# Altium PCB SteeringWheelInterfaceBoard.PcbDoc
Units mm, origin at the board's own origin, x right, y up, seen from the top; angles counter-clockwise.
Board outline 90 x 30 mm, 2 copper layers (Top Layer, Bottom Layer); 36 components, 24 nets, 129 pads, 54 vias.
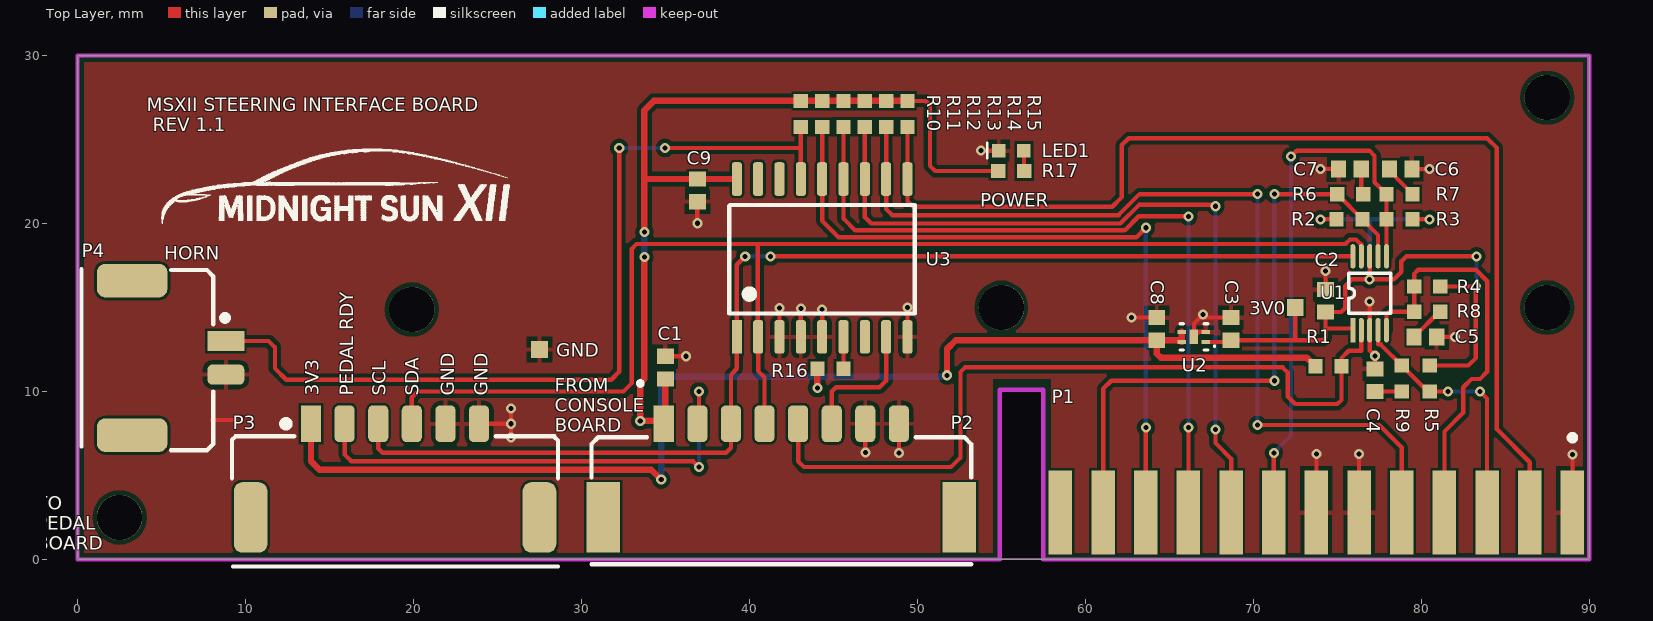
[diagram p0: Top Layer view]
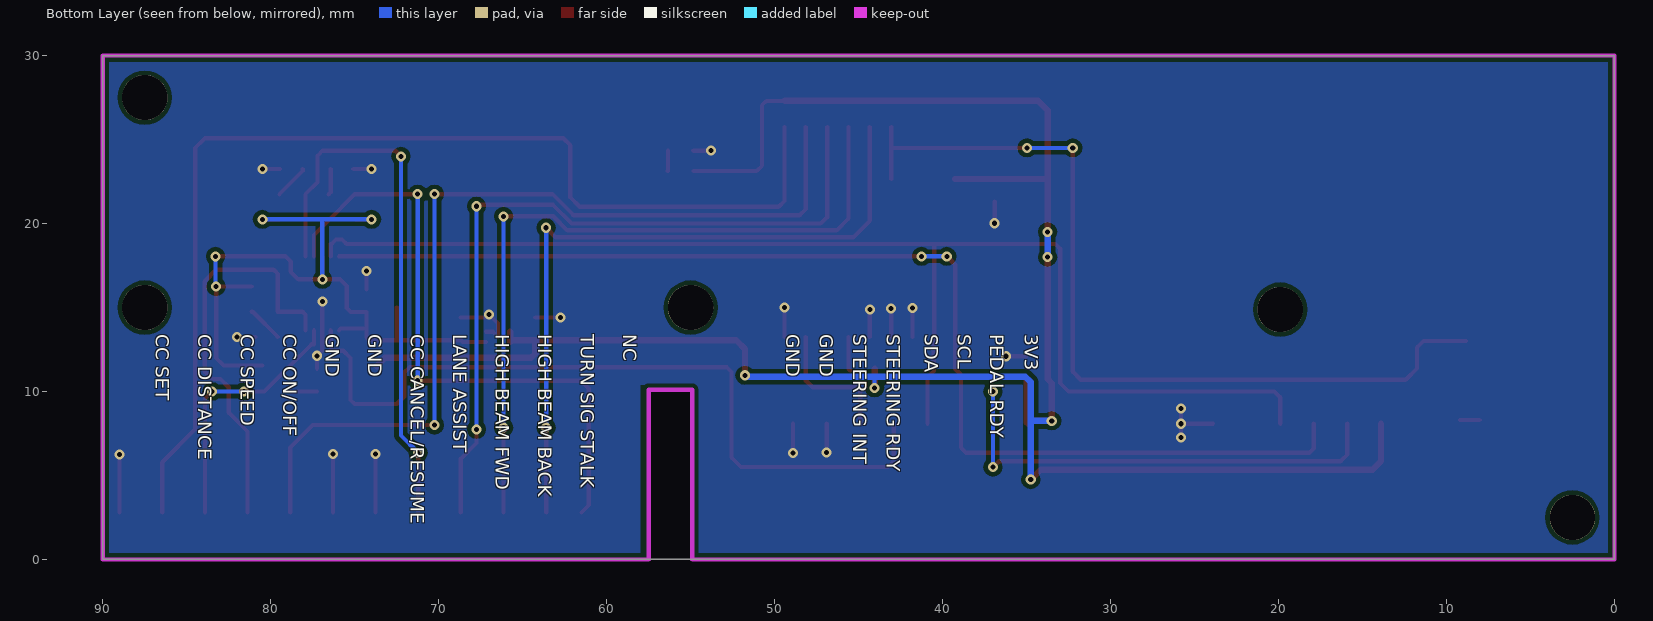
[diagram p1: Bottom Layer view, seen from below]
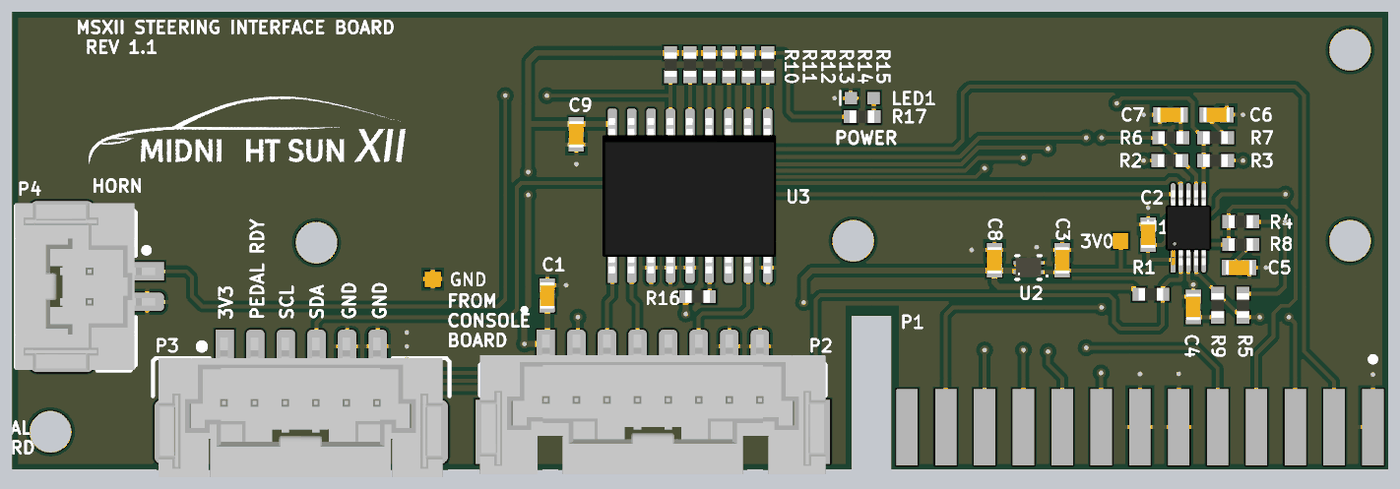
[diagram p2: 3D render of the assembled board from above, using the file's embedded part models]

## Layer stack, top to bottom
Top Solder: solder mask 0.0102, Solder Resist, Dk 3.5
Top Layer: signal copper 0.0356
Dielectric 1: dielectric 0.32, FR-4, Dk 4.8
Bottom Layer: signal copper 0.0356
Bottom Solder: solder mask 0.0102, Solder Resist, Dk 3.5

## Board outline
0,0 90,0 90,30 0,30
cut-out: 57.5,10.1 57.5,0 54.9,0 54.9,10.1

## Design rules (kind name [scope] priority, off if disabled: settings)
Clearance [All] p1: gap=0.254 ignorepadtopadclearanceinfootprint=FALSE except(0: Arc-Hole Track-Hole SMDPad-Hole THPad-Hole Via-Hole Fill-Hole Poly-Hole Region-Hole Text-Hole; 0.152: Arc-Arc Arc-Track Arc-SMDPad Track-Track Track-SMDPad SMDPad-SMDPad SMDPad-THPad SMDPad-Fill SMDPad-Poly SMDPad-Region)
PlaneConnect [All] p1: pad.planeconnectstyle=Relief pad.reliefexpansion=0.508 pad.reliefentries=4 pad.reliefconductorwidth=0.254 pad.reliefairgap=0.254 via.planeconnectstyle=Direct via.reliefexpansion=0.508 via.reliefentries=4 via.reliefconductorwidth=0.254 via.reliefairgap=0.254
PolygonConnect [All] p1: thpad.connectstyle=Relief thpad.reliefconductorwidth=0.254 thpad.reliefentries=4 thpad.polygonreliefangle="90 Angle" thpad.airgapwidth=0.254 smdpad.connectstyle=Relief smdpad.reliefconductorwidth=0.254 smdpad.reliefentries=4 smdpad.polygonreliefangle="90 Angle" smdpad.airgapwidth=0.254 via.connectstyle=Direct via.reliefconductorwidth=0.254 via.reliefentries=4 via.polygonreliefangle="90 Angle" via.airgapwidth=0.254
RoutingVias [All] p1: holewidth=0.3 width=0.6 viastyle="Through Hole" minholewidth=0.3 minwidth=0.6 maxholewidth=0.3 maxwidth=0.6
SolderMaskExpansion [All] p1: expansion=0.102
Width [All] p1: maxlimit=0.508 minlimit=0.254 preferedwidth=0.254
29 further rules are at their usual default settings.

## Components (designator, comment, footprint, x,y, rotation, side; value= is the part's Value field where it differs from the comment)
3V0 "Test Point" "Test Point" 72.5,15 r90 top (schematic designator TP1)
C1 "CAP CER 4.7UF 25V 10% X5R 0603" "CAP, 0603" 35,11.425 r90 top
C2 "CAP CER 0.1UF 50V 10% X7R 0603" "CAP, 0603" 74.3,15.404 r90 top
C3 "CAP CER 1UF 50V 10% X7R 0603" "CAP, 0603" 68.68,13.725 r90 top
C4 "CAP CER 1UF 50V 10% X7R 0603" "CAP, 0603" 77.25,10.675 r90 top
C5 "CAP CER 1UF 50V 10% X7R 0603" "CAP, 0603" 80.25,13.25 r0 top
C6 "CAP CER 1UF 50V 10% X7R 0603" "CAP, 0603" 78.775,23.25 r0 top
C7 "CAP CER 1UF 50V 10% X7R 0603" "CAP, 0603" 75.755,23.25 r180 top
C8 "CAP CER 1UF 50V 10% X7R 0603" "CAP, 0603" 64.25,13.725 r90 top
C9 "CAP CER 0.1UF 50V 10% X7R 0603" "CAP, 0603" 36.9,21.975 r270 top
GND "Test Point" "Test Point" 27.502,12.5 r90 top (schematic designator TP2)
LED1 "LED GREEN CLEAR 2V 0603" LED_0603 56.292,24.349 r180 top
P1 "Footprint Only" "CONN 13POS CARD EDGE" 89,2.8 r180 top
P2 "CONN 8POS DURA-CLIK 0.079\"" "CONN, 8POS Dura-Clik" 34.9,8.08 r0 top
P3 "DURA-CLIK" "CONN, 6POS DURA-CLIK VERT" 13.9,8.08 r0 top
P4 "Dura-Clik" "CONN, 2POS Dura-Click Vertical" 8.83,13.005 r270 top
R1 "RES 10K OHM 1% 1/10W 0603" "RES, 0603" 74.475,11.5 r0 top
R2 "RES 3.83K OHM 1% 1/10W 0603" "RES, 0603" 75.725,20.25 r0 top
R3 "RES 3.83K OHM 1% 1/10W 0603" "RES, 0603" 78.705,20.25 r180 top
R4 "RES 3.83K OHM 1% 1/10W 0603" "RES, 0603" 80.35,16.25 r180 top
R5 "RES 3.83K OHM 1% 1/10W 0603" "RES, 0603" 80.5,10.775 r270 top
R6 "RES 100 OHM 1% 1/10W 0603" "RES, 0603" 75.775,21.75 r0 top
R7 "RES 100 OHM 1% 1/10W 0603" "RES, 0603" 78.705,21.75 r0 top
R8 "RES 100 OHM 1% 1/10W 0603" "RES, 0603" 80.35,14.75 r0 top
R9 "RES 100 OHM 1% 1/10W 0603" "RES, 0603" 78.84,10.775 r270 top
R10 "RES 10K OHM 1% 1/10W 0603" "RES, 0603" 43.06,26.525 r270 top
R11 "RES 10K OHM 1% 1/10W 0603" "RES, 0603" 44.33,26.525 r270 top
R12 "RES 10K OHM 1% 1/10W 0603" "RES, 0603" 45.6,26.525 r270 top
R13 "RES 10K OHM 1% 1/10W 0603" "RES, 0603" 46.87,26.525 r270 top
R14 "RES 10K OHM 1% 1/10W 0603" "RES, 0603" 48.14,26.525 r270 top
R15 "RES 10K OHM 1% 1/10W 0603" "RES, 0603" 49.41,26.525 r270 top
R16 "RES 10K OHM 1% 1/10W 0603" "RES, 0603" 44.825,11.35 r0 top
R17 "RES 604 OHM 1% 1/10W 0603" "RES, 0603" 55.585,23.123 r0 top
U1 "AD1015" "IC ADC VSSOP10" 75.93,13.65 r90 top
U2 "MIC94310" "IC REG LDO 3V 0.2A 4-TDFN" 67.178,12.95 r90 top
U3 "MCP23008" "IC 18SOIC" 39.25,13.25 r0 top

## Footprints (in the part's own frame and the unit in brackets; to place one, negate y for a bottom-side part, rotate by r counter-clockwise, add the part's x,y. Pads: shape width x height; smd on the part's side, far side on the other; paste and mask are expansions set on the pad)
"CAP, 0603" [mm] "Chip Capacitor, 2-Leads, Body 1.60x0.81mm, IPC Medium Density"
  rect 0.9x1 smd mask+0.076: 1(-0.675,0) 2(0.675,0)
  body extent -0.87,-0.48 0.87,0.48, height 0.9
"CONN 13POS CARD EDGE" [mm]
  rect 1.4x5 smd: 1(0,0) 2(2.54,0) 3(5.08,0) 4(7.62,0) 5(10.16,0) 6(12.7,0) 7(15.24,0) 8(17.78,0) 9(20.32,0) 10(22.86,0) 11(25.4,0) 12(27.94,0) 13(30.48,0)
"CONN, 2POS Dura-Click Vertical" [mm] "WM7169CT-ND"
  rect 1.2x2.2 smd: 1(0,0)
  rrect50% 1.2x2.2 smd: 2(2,0)
  rrect50% 2x4.2 smd: 3(-3.6,-5.58) 3(5.6,-5.58)
  silkscreen extent -4.28,-8.6 6.5,0.05, body extent -4.45,-8.64 6.45,0.51, height 8
"CONN, 6POS DURA-CLIK VERT" [mm]
  rect 1.2x2.2 smd: 1(0,0)
  rrect50% 1.2x2.2 smd: 2(2,0) 3(4,0) 4(6,0) 5(8,0) 6(10,0)
  rrect50% 2x4.2 smd: 7(-3.6,-5.58) 7(13.6,-5.58)
  silkscreen extent -4.7,-8.5 14.7,0.15, body extent -4.35,-8.54 14.25,0.61, height 7.97
"CONN, 8POS Dura-Clik" [mm] "WM10868CT-ND"
  rect 1.2x2.2 smd: 1(0,0)
  rrect50% 1.2x2.2 smd: 2(2,0) 3(4,0) 4(6,0) 5(8,0) 6(10,0) 7(12,0) 8(14,0)
  rect 2x4.2 smd: ""(-3.6,-5.58) ""(17.6,-5.58)
  silkscreen extent -4.3,-8.36 18.3,2.53, body extent -4.3,-8.36 18.3,0.79, height 8.02
"IC 18SOIC" [mm]
  rect 0.6x2 smd: 1(0,0)
  rrect50% 0.6x2 smd: 2(1.27,0) 3(2.54,0) 4(3.81,0) 5(5.08,0) 6(6.35,0) 7(7.62,0) 8(8.89,0) 9(10.16,0) 10(10.16,9.4) 11(8.89,9.4) 12(7.62,9.4) 13(6.35,9.4) 14(5.08,9.4) 15(3.81,9.4) 16(2.54,9.4) 17(1.27,9.4) 18(0,9.4)
  silkscreen extent -0.45,1.4 10.6,7.85, body extent -0.62,-0.38 10.72,9.78, height 2
"IC ADC VSSOP10" [mm]
  rect 1.45x0.3 smd: 1(0,0)
  oval 1.45x0.3 smd: 2(0,-0.5) 3(0,-1) 4(0,-1.5) 5(0,-2) 6(4.4,-2) 7(4.4,-1.5) 8(4.4,-1) 9(4.4,-0.5) 10(4.4,0)
  silkscreen extent 1,-2.25 3.4,0.25, body extent -0.25,-2.5 4.65,0.5, height 1.15
"IC REG LDO 3V 0.2A 4-TDFN" [mm] "QFN, 4-Leads, Body 1.20x1.60mm, Pitch 0.50mm/1.40mm, Thermal Pad 0.86x0.50mm, IPC Medium Density"
  rect 0.25x0.5 smd: 1(0,0) 2(0.6,0) 3(0.6,1.44) 4(0,1.44)
  rect 0.86x0.5 smd: 5(0.3,0.715)
  silkscreen extent -0.48,-0.56 1.07,1.54, body extent -0.33,-0.11 0.92,1.54, height 0.6
LED_0603 [mm]
  rect 0.8x0.8 smd: 1(-0.05,0.01) 2(1.45,0.01)
  silkscreen extent 2.13,-0.46 2.13,0.45, body extent -0.09,-0.39 1.51,0.41, height 0.8
"RES, 0603" [mm] "Chip Resistor, 2-Leads, Body 1.60x0.80mm, IPC Medium Density"
  rect 0.85x0.85 smd: 1(-0.775,0) 2(0.775,0)
  body extent -0.8,-0.4 0.8,0.4, height 0.55
"Test Point" [mm]
  rect 1x1 smd paste-2: TP(0,0)

## Part data
C1: "4.7µF ±10% 25V Ceramic Capacitor X5R 0603 (1608 Metric)", Capacitance=4.7µF, Manufacturer 1="Murata Electronics North America", Manufacturer Part Number 1=GRM188R61E475KE11D, Operating Temperature="-55°C ~ 85°C", Package / Case="0603 (1608 Metric)", Ratings=-, Supplier Part Number 1=490-7203-1-ND, Temperature Coefficient=X5R, Tolerance=±10%, Voltage=25V, ComponentLink1Description=http://www.murata.com/~/media/webrenewal/support/library/catalog/products/capacitor/mlcc/c02e.ashx, ComponentLink1URL=http://www.murata.com/~/media/webrenewal/support/library/catalog/products/capacitor/mlcc/c02e.ashx, Height - Seated (Max)=-, Lead Spacing=-, Lead Style=-, Mounting Type="Surface Mount, MLCC", Packaging="Cut Tape (CT)", Part Status=Active, Size / Dimension="0.063\" L x 0.031\" W (1.60mm x 0.80mm)", Supplier 1=Digi-Key, Thickness (Max)="0.031\" (0.80mm)"
C2 C9: "0.10µF ±10% 50V Ceramic Capacitor X7R 0603 (1608 Metric)", Capacitance=0.1µF, Manufacturer 1="AVX Corporation", Manufacturer Part Number 1=06035C104KAT2A, Operating Temperature="-55°C ~ 125°C", Package / Case="0603 (1608 Metric)", Ratings=-, Supplier Part Number 1=478-5052-1-ND, Temperature Coefficient=X7R, Tolerance=±10%, Voltage=50V, ComponentLink1Description=http://datasheets.avx.com/X7RDielectric.pdf, ComponentLink1URL=http://datasheets.avx.com/X7RDielectric.pdf, Height - Seated (Max)=-, Lead Spacing=-, Lead Style=-, Mounting Type="Surface Mount, MLCC", Packaging="Cut Tape (CT)", Part Status=Active, Size / Dimension="0.063\" L x 0.032\" W (1.60mm x 0.81mm)", Supplier 1=Digi-Key, Thickness (Max)="0.035\" (0.90mm)"
C3 C4 C5 C6 C7 C8: "1µF ±10% 50V Ceramic Capacitor X7R 0603 (1608 Metric)", Capacitance=1µF, Manufacturer 1="Taiyo Yuden", Manufacturer Part Number 1=UMK107AB7105KA-T, Operating Temperature="-55°C ~ 125°C", Package / Case="0603 (1608 Metric)", Ratings=-, Supplier Part Number 1=587-3247-1-ND, Temperature Coefficient=X7R, Tolerance=±10%, Voltage=50V, ComponentLink1Description=http://www.yuden.co.jp/productdata/catalog/en/mlcc_all_e.pdf, ComponentLink1URL=http://www.yuden.co.jp/productdata/catalog/en/mlcc_all_e.pdf, Height - Seated (Max)=-, Lead Spacing=-, Lead Style=-, Mounting Type="Surface Mount, MLCC", Packaging="Cut Tape (CT)", Part Status=Active, Size / Dimension="0.063\" L x 0.031\" W (1.60mm x 0.80mm)", Supplier 1=Digi-Key, Thickness (Max)="0.037\" (0.95mm)"
LED1: "Green 572nm LED Indication - Discrete 2V 0603 (1608 Metric)", Color=Green, Current - Test=20mA, Lens Color=Colorless, Manufacturer="Wurth Electronics Inc.", Manufacturer Part Number=150060VS75000, Millicandela Rating=40mcd, Package / Case="0603 (1608 Metric)", Supplier Device Package=0603, Supplier Part Number 1=732-4980-1-ND, Voltage - Forward (Vf) (Typ)=2V, Category=Optoelectronics, ComponentLink1Description=http://katalog.we-online.de/led/datasheet/150060VS75000.pdf, ComponentLink1URL=http://katalog.we-online.de/led/datasheet/150060VS75000.pdf, Features=-, Height (Max)=0.80mm, Lens Style/Size="Rectangle with Flat Top, 1.10mm x 0.70mm", Lens Transparency=Clear, Mounting Type="Surface Mount", Packaging="Cut Tape (CT)", Part Status=Active, Pricing 1="1=0.21, 100=0.1617, 500=0.13964 (CAD)", RoHS="RoHS Compliant", Size / Dimension="1.60mm L x 0.80mm W", Stock 1=9408, Supplier 1=Digi-Key, Viewing Angle=140°, Wavelength - Dominant=570nm, Wavelength - Peak=572nm
P1: library part "CONN 13POS 0.1\" CARD EDGE"
P2: "8 Positions Header Connector 0.079\" (2.00mm) Surface Mount Tin", Current Rating=-, Insulation Color=Natural, Manufacturer 1="Molex, LLC", Manufacturer Part Number 1=5600200820, Supplier Part Number 1=WM10868CT-ND, ComponentLink1Description=http://www.molex.com/pdm_docs/sd/5600200820_sd.pdf, ComponentLink1URL=http://www.molex.com/pdm_docs/sd/5600200820_sd.pdf, Connector Type=Header, Contact Finish - Mating=Tin, Contact Finish - Post=Tin, Contact Finish Thickness - Mating=-, Contact Finish Thickness - Post=-, Contact Length - Mating=-, Contact Length - Post=-, Contact Material="Copper Alloy", Contact Shape=Square, Contact Type="Male Pin", Fastening Type="Latch Lock", Ingress Protection=-, Insulation Height="0.315\" (8.00mm)", Insulation Material="Polyamide (PA), Nylon", Mated Stacking Heights=9.3mm, Material Flammability Rating=-, Mounting Type="Surface Mount", Number of Positions=8, Number of Positions Loaded=All, Number of Rows=1, Operating Temperature=-, Overall Contact Length=-, Packaging="Cut Tape (CT)", Part Status=Active, Pitch - Mating="0.079\" (2.00mm)", Row Spacing - Mating=-, Series=DuraClik, Shrouding="Shrouded - 4 Wall", Style="Board to Cable/Wire", Supplier 1=Digi-Key, Termination=Solder, Voltage=-
P3: library part "CONN 6POS DURA-CLIK 0.079\"", "6 Positions Header, Shrouded Connector 0.079\" (2.00mm) Surface Mount, Vertical Tin", Current Rating=-, Insulation Color=Natural, Manufacturer=Molex, Manufacturer Part Number=5600200820, Supplier Part Number 1=WM10866CT-ND, Applications="Automotive, Industrial", Category="Connectors, Interconnects", ComponentLink1Description=http://www.molex.com/pdm_docs/sd/5600200220_sd.pdf, ComponentLink1URL=http://www.molex.com/pdm_docs/sd/5600200220_sd.pdf, Connector Type=Header, Contact Finish - Mating=Tin, Contact Finish - Post=Tin, Contact Finish Thickness - Mating=-, Contact Finish Thickness - Post=-, Contact Length - Mating=-, Contact Length - Post=-, Contact Material="Copper Alloy", Contact Shape=Square, Contact Type="Male Pin", Fastening Type="Latch Lock", Features="Solder Retention", Ingress Protection=-, Insulation Height="0.315\" (8.00mm)", Insulation Material="Polyamide (PA), Nylon", Mated Stacking Heights=9.3mm, Material Flammability Rating=-, Mounting Type="Surface Mount", Number of Positions=6, Number of Positions Loaded=All, Number of Rows=1, Operating Temperature=-, Overall Contact Length=-, Packaging="Cut Tape (CT)", Part Status=Active, Pitch - Mating="0.079\" (2.00mm)", Pricing 1="1=1.76, 10=1.542, 25=1.4512, 50=1.391, 100=1.3305, 250=1.20956 (CAD)", RoHS="RoHS Compliant", Row Spacing - Mating=-, Shrouding="Shrouded - 4 Wall", Stock 1=3826, Style="Board to Cable/Wire", Supplier 1=Digi-Key, Termination=Solder, Voltage Rating=-
P4: library part "CONN 2POS DURA-CLIK 0.079\" VERT", "2 Positions Header, Shrouded Connector 0.079\" (2.00mm) Surface Mount, Vertical Tin", Current Rating=-, Insulation Color=Natural, Manufacturer="Molex, LLC", Manufacturer Part Number=5600200220, Supplier Part Number 1=WM10862CT-ND, Applications="Automotive, Industrial", Category="Connectors, Interconnects", ComponentLink1Description=http://www.molex.com/pdm_docs/sd/5600200220_sd.pdf, ComponentLink1URL=http://www.molex.com/pdm_docs/sd/5600200220_sd.pdf, Connector Type=Header, Contact Finish - Mating=Tin, Contact Finish - Post=Tin, Contact Finish Thickness - Mating=-, Contact Finish Thickness - Post=-, Contact Length - Mating=-, Contact Length - Post=-, Contact Material="Copper Alloy", Contact Shape=Square, Contact Type="Male Pin", Fastening Type="Latch Lock", Features="Solder Retention", Ingress Protection=-, Insulation Height="0.315\" (8.00mm)", Insulation Material="Polyamide (PA), Nylon", Mated Stacking Heights=9.3mm, Material Flammability Rating=-, Mounting Type="Surface Mount", Number of Positions=2, Number of Positions Loaded=All, Number of Rows=1, Operating Temperature=-, Overall Contact Length=-, Packaging="Cut Tape (CT)", Part Status=Active, Pitch - Mating="0.079\" (2.00mm)", Pricing 1="1=1.16, 10=1.012, 25=0.952, 50=0.9122, 100=0.8727, 250=0.79336 (CAD)", RoHS="RoHS Compliant", Row Spacing - Mating=-, Shrouding="Shrouded - 4 Wall", Stock 1=11912, Style="Board to Cable/Wire", Supplier 1=Digi-Key, Termination=Solder, Voltage Rating=-
R1 R16: "RES SMD 10K OHM 1% 1/10W 0603", Manufacturer 1=Yageo, Manufacturer Part Number 1=RC0603FR-0710KL, Operating Temperature="-55°C ~ 155°C", Package / Case="0603 (1608 Metric)", Power=1/10W, Resistance=10k, Supplier Device Package=0603, Supplier Part Number 1=311-10.0KHRCT-ND, Temperature Coefficient=±100ppm/°C, Tolerance=±1%, ComponentLink1Description=http://www.yageo.com/documents/recent/PYu-RC_Group_51_RoHS_L_7.pdf, ComponentLink1URL=http://www.yageo.com/documents/recent/PYu-RC_Group_51_RoHS_L_7.pdf, Composition="Thick Film", Failure Rate=-, Height - Seated (Max)="0.022\" (0.55mm)", Packaging="Cut Tape (CT)", Part Status=Active, Size / Dimension="0.063\" L x 0.031\" W (1.60mm x 0.80mm)", Supplier 1=Digi-Key
R2 R3 R4 R5: "3.83 kOhms ±1% 0.1W, 1/10W Chip Resistor 0603 (1608 Metric) Moisture Resistant Thick Film", Case/Package=0603, Case Code (Metric)=1608, Manufacturer=Yageo, Manufacturer Part Number=RC0603FR-073K83L, Max Operating Temperature=155°C, Min Operating Temperature=-55°C, Power Rating="1/10 W", Resistance=3.83k, Supplier Part Number 1=311-3.83KHRCT-ND, Temperature Coefficient=100ppm/°C, Tolerance=1%, Voltage Rating=75V, Voltage Rating (DC)=50V, Case Code (Imperial)=0603, ComponentLink1Description=https://datasheet.ciiva.com/11819/0900766b80f96399-11819347.pdf, ComponentLink1URL=https://datasheet.ciiva.com/11819/0900766b80f96399-11819347.pdf, ComponentLink2Description=https://datasheet.ciiva.com/15189/getdatasheetpartid-327814-15189723.pdf, ComponentLink2URL=https://datasheet.ciiva.com/15189/getdatasheetpartid-327814-15189723.pdf, Composition="Thick Film", Depth=0.8mm, Height=0.45mm, Lead Free="Lead Free", Length=1.6mm, Military Standard=Not, Mount="Surface Mount", Number of Terminations=2, Packaging="Tape and Reel", Pricing 1="1=0.1, 10=0.015, 100=0.006, 1000=0.00268, 2500=0.00233 (USD)", Stock 1=150132, Supplier 1=Digi-Key, Termination=SMD/SMT, Weight=7.1E-05oz, Width=0.8mm, Working Voltage=75V
R6 R7 R8 R9: "100 Ohm ±1% 0.1W, 1/10W Chip Resistor 0603 (1608 Metric) Moisture Resistant Thick Film", Manufacturer 1=Yageo, Manufacturer Part Number 1=RC0603FR-07100RL, Operating Temperature="-55°C ~ 155°C", Package / Case="0603 (1608 Metric)", Resistance=100, Supplier Device Package=0603, Supplier Part Number 1=311-100HRCT-ND, Temperature Coefficient=±100ppm/°C, Tolerance=±1%, ComponentLink1Description=http://www.yageo.com/documents/recent/PYu-RC_Group_51_RoHS_L_7.pdf, ComponentLink1URL=http://www.yageo.com/documents/recent/PYu-RC_Group_51_RoHS_L_7.pdf, Composition="Thick Film", Failure Rate=-, Height - Seated (Max)="0.022\" (0.55mm)", Packaging="Cut Tape (CT)", Part Status=Active, Size / Dimension="0.063\" L x 0.031\" W (1.60mm x 0.80mm)", Supplier 1=Digi-Key
R10 R11 R12 R13 R14 R15: "RES SMD 10K OHM 1% 1/10W 0603", Manufacturer 1=Yageo, Manufacturer Part Number 1=RC0603FR-0710KL, Operating Temperature="-55°C ~ 155°C", Package / Case="0603 (1608 Metric)", Power=1/10W, Resistance=10k, Supplier Device Package=0603, Supplier Part Number 1=311-10.0KHRCT-ND, Temperature Coefficient=±100ppm/°C, Tolerance=1%, ComponentLink1Description=http://www.yageo.com/documents/recent/PYu-RC_Group_51_RoHS_L_7.pdf, ComponentLink1URL=http://www.yageo.com/documents/recent/PYu-RC_Group_51_RoHS_L_7.pdf, Composition="Thick Film", Failure Rate=-, Height - Seated (Max)="0.022\" (0.55mm)", Packaging="Cut Tape (CT)", Part Status=Active, Size / Dimension="0.063\" L x 0.031\" W (1.60mm x 0.80mm)", Supplier 1=Digi-Key
R17: "RES SMD 604 OHM 1% 1/10W 0603", Manufacturer 1=Yageo, Manufacturer Part Number 1=RC0603FR-07604RL, Operating Temperature="-55°C ~ 155°C", Package / Case="0603 (1608 Metric)", Power=1/10W, Resistance=604, Supplier Device Package=0603, Supplier Part Number 1=311-604HRCT-ND, Temperature Coefficient=±100ppm/°C, Tolerance=±1%, ComponentLink1Description=http://www.yageo.com/documents/recent/PYu-RC_Group_51_RoHS_L_7.pdf, ComponentLink1URL=http://www.yageo.com/documents/recent/PYu-RC_Group_51_RoHS_L_7.pdf, Composition="Thick Film", Failure Rate=-, Height - Seated (Max)="0.022\" (0.55mm)", Packaging="Cut Tape (CT)", Part Status=Active, Size / Dimension="0.063\" L x 0.031\" W (1.60mm x 0.80mm)", Supplier 1=Digi-Key
U1: library part "IC ADC 12-BIT VSSOP-10", "12 Bit Analog to Digital Converter 4 Input 1 Sigma-Delta 10-VSSOP", Manufacturer="Texas Instruments", Manufacturer Part Number=ADS1015IDGSR, Operating Temperature="-40°C ~ 125°C", Package / Case="10-TFSOP, 10-MSOP (0.118\", 3.00mm Width)", Supplier Device Package=10-VSSOP, Supplier Part Number 1=296-41185-1-ND, Voltage - Supply, Analog="2 V ~ 5.5 V", Architecture=Sigma-Delta, Category="Integrated Circuits (ICs)", ComponentLink1Description=http://www.ti.com/lit/ds/symlink/ads1013.pdf, ComponentLink1URL=http://www.ti.com/lit/ds/symlink/ads1013.pdf, Configuration=MUX-PGA-ADC, Data Interface=I²C, Features="PGA, Selectable Address", Input Type="Differential, Single Ended", Number of A/D Converters=1, Number of Bits=12, Number of Inputs="2, 4", Packaging="Cut Tape (CT)", Part Status=Active, Pricing 1="1=4.25, 10=3.807, 100=3.1194, 500=2.65552, 1000=2.23959 (CAD)", Ratio - S/H:ADC=-, Reference Type=Internal, RoHS="RoHS Compliant", Sampling Rate (Per Second)=3.3k, Stock 1=4084, Supplier 1=Digi-Key, Voltage - Supply, Digital="2 V ~ 5.5 V"
U2: library part "IC REG LDO 3V 0.2A 4-TDFN", Current - Limit (Min)=250mA, Current - Output=200mA, Manufacturer="Microchip Technology", Manufacturer Part Number=MIC94310-PYMT-TR, Operating Temperature="-40°C ~ 125°C", Package / Case="4-UFDFN Exposed Pad", Supplier Device Package="4-TDFN (1.2x1.6)", Supplier Part Number 1=576-4761-1-ND, Voltage - Dropout (Typical)="0.04V @ 200mA", Voltage - Input="Up to 3.6V", Voltage - Output=3V, Category="Integrated Circuits (ICs)", ComponentLink1Description=http://www.microchip.com/mymicrochip/filehandler.aspx?ddocname=en580409, ComponentLink1URL=http://www.microchip.com/mymicrochip/filehandler.aspx?ddocname=en580409, Mounting Type="Surface Mount", Packaging="Cut Tape (CT)", Part Status=Active, Pricing 1="1=0.45, 25=0.3708, 100=0.3386 (CAD)", Regulator Topology="Positive Fixed", RoHS="RoHS Compliant", Stock 1=4802, Supplier 1=Digi-Key
U3: library part "IC I/O EXPANDER I2C 8B 18SOIC", "MCP23008 I/O Expander 8B+1Int 18P SOIC", Current - Output Source/Sink=25mA, Manufacturer="Microchip Technology", Manufacturer Part Number=MCP23008T-E/SO, Operating Temperature="-40°C ~ 125°C", Package / Case="18-SOIC (0.295\", 7.50mm Width)", Supplier Device Package=18-SOIC, Supplier Part Number 1=MCP23008T-E/SOCT-ND, Voltage - Supply="1.8 V ~ 5.5 V", Category="Integrated Circuits (ICs)", ComponentLink1Description=http://www.microchip.com/mymicrochip/filehandler.aspx?ddocname=en021920, ComponentLink1URL=http://www.microchip.com/mymicrochip/filehandler.aspx?ddocname=en021920, Features=POR, Interface=I²C, Interrupt Output=Yes, Mounting Type="Surface Mount", Number of I/O=8, Output Type=Push-Pull, Packaging="Cut Tape (CT)", Part Status=Active, Pricing 1="1=1.62, 25=1.3548, 100=1.2431 (CAD)", RoHS="RoHS Compliant", Stock 1=5607, Supplier 1=Digi-Key

## Free pads (board coordinates)
  round 2.7 hole 2.7: ""(2.5,2.5) ""(19.9,14.88) ""(55.002,15) ""(87.5,15) ""(87.5,27.5)

## Via types
v1: diameter 0.6, hole 0.3, Top Layer to Bottom Layer, tented both sides, 54 vias

## Nets (pads, with @x,y where several pads share a name; then routed paths per layer and width w, separated by ;. In a path a pad name is that pad's centre, name@x,y a point inside that pad or via, vN(x,y) a via of type N, cw(c..) or ccw(c..) an arc to the next point about the centre after c; other vN are vias at no path point)
3V0: 3V0.TP C2.1 C3.1 R2.1 R3.1 R4.1 R5.1 U1.1 U1.8 U2.1 | length 47.8
  Top Layer w0.254: U2.1 68.58,12.95 C3.1 72.5,13.05 ; 3V0.TP 72.5,13.05 ; v1(74,20.25) R2.1 ; 74.451,13.75 75.83,13.75 U1.1 ; U1.8 v1(76.93,16.68) ; R3.1 v1(80.5,20.25) ; R5.1 82.8,11.55 83.25,12 v1@83.25,16 ; R4.1 v1@83,16.25 ; v1(83.284,18.05) 79.115,18.05 78.812,17.748 78.812,17.123 78.369,16.68 v1(76.93,16.68) ; 72.5,13.05 74.152,13.05 74.3,13.199 C2.1 75.238,14.729 75.477,14.969 75.477,16.28 75.877,16.68 v1(76.93,16.68)
  Bottom Layer w0.254: v1(74,20.25) 77,20.25 ; v1(76.93,16.68) 76.93,20.18 77,20.25 ; v1(80.5,20.25) 77,20.25 ; v1(83.25,16.25) 83.284,16.284 v1(83.284,18.05)
3V3: C1.1 C8.1 C9.1 P2.1 P3.1 R1.1 R10.1 R11.1 R12.1 R13.1 R14.1 R15.1 R16.1 R17.1 U2.3 U2.4 U3.18 | length 129.9
  Top Layer w0.254: R15.1 50.5,27.3 50.75,27.05 50.75,23.435 51.062,23.123 R17.1
  Top Layer w0.381: P3.1 13.9,5.85 14.4,5.35 34.15,5.35 v1(34.75,4.75) ; v1(33.75,18) 33.75,10.75 33.5,10.5 v1(33.5,8.25) 34.93,8.25 P2.1@35,8.18 ; v1(33.75,19.5) 33.75,26.75 34.3,27.3 R10.1 R11.1 R12.1 R13.1 R14.1 R15.1 ; 33.9,22.65 C9.1 U3.18 ; P2.1 P2.1@35,8.18 ; C1.1 P2.1@35,8.18 ; v1(44.05,10.216) R16.1 ; v1(51.765,10.966) 51.765,12.534 52.282,13.05 C8.1 ; U2.3 U2.4 65.638,13.05 C8.1 ; R1.1 73.2,12 64.5,12 64.25,12.25 C8.1
  Bottom Layer w0.254: 44,10.887 44.05,10.837 v1(44.05,10.216)
  Bottom Layer w0.381: v1(33.5,8.25) 34.75,8.25 ; v1(33.75,18) v1(33.75,19.5) ; v1(34.75,4.75) 34.75,8.25 ; v1(51.765,10.966) 51.686,10.887 44,10.887 35.07,10.887 34.75,10.566 34.75,8.25
AIN0_CC_DISTANCE: P1.3 R5.2 R9.1 U1.4 | length 15.4
  Top Layer w0.254: U1.4 77.43,12.808 77.582,12.808 R9.1 80.39,10 R5.2 v1(81.6,10) ; v1(83.5,10) 83.92,9.58 P1.3
  Bottom Layer w0.254: v1(81.6,10) v1(83.5,10)
AIN1_CC_SPEED: P1.4 R4.2 R8.1 U1.5 | length 24.8
  Top Layer w0.254: U1.5 77.93,14.58 78.1,14.75 R8.1 R4.2 79.575,17 79.825,17.25 83.25,17.25 83.931,16.569 83.931,11.181 83.5,10.75 83,10.75 82.5,10.25 82.5,8.74 81.38,7.62 P1.4
AIN2_CC_CANCEL/RESUME: P1.8 R3.2 R7.1 U1.6 | length 33.1
  Top Layer w0.254: P1.8 v1(71.22,6.35) ; v1(72.25,24) 72.589,24.339 76.911,24.339 77.221,24.029 77.221,22.459 R7.1 R3.2 U1.6
  Bottom Layer w0.254: v1(71.22,6.35) 72.25,7.38 v1(72.25,24)
AIN3_TURN_SIGNAL_STALK: P1.12 R2.2 R6.1 U1.7 | length 37.5
  Top Layer w0.254: P1.12@61.5,2.8 61.06,3.24 61.06,10.16 61.54,10.64 v1(71.25,10.64) ; v1(71.25,21.75) R6.1 R2.2 77.43,19.32 U1.7
  Bottom Layer w0.254: v1(71.25,10.64) 71.22,10.67 71.25,10.7 v1(71.25,21.75)
GND: C1.2 C2.2 C3.2 C4.2 C5.2 C6.2 C7.2 C8.2 C9.2 GND.TP LED1.2 P1.1 P1.6 P1.7 P2.7 P2.8 P3.5 P3.6 P4.2 U1.3 U2.2 U2.5 U3.3 U3.4 U3.5 U3.9 | length 43.1
  Top Layer w0.254: 8.01,8.3 9.2,8.3 ; P3.6 v1(25.81,8.08) ; v1(25.81,7.25) v1(25.81,8.08) ; v1(25.81,9) v1(25.81,8.08) ; C1.2 v1(36.22,12.1) ; v1(36.9,20.018) C9.2 ; U3.3 v1(41.79,14.96) ; U3.4 v1(43.06,14.94) ; U3.5 v1(44.33,14.88) ; v1(46.9,6.38) P2.7 ; v1(48.9,6.35) P2.8 ; U3.9 v1(49.41,15) ; v1(53.786,24.339) LED1.2 ; v1(62.75,14.4) C8.2 ; U2.2 66.763,13.55 U2.5 66.463,14.044 v1(67,14.58) 67.18,14.4 C3.2 ; P1.7 v1(73.76,6.281) ; v1(74,23.25) C7.2 ; C2.2 v1(74.3,17.168) ; P1.6 v1(76.3,6.291) ; v1(76.93,15.362) U1.3 76.93,12.447 v1(77.25,12.127) C4.2 ; C6.2 v1(80.5,23.25) ; C5.2 v1(82,13.25) ; P1.1 v1(89,6.25)
GP0_CC_SET: P1.2 R15.2 U3.10 | length 65.9
  Top Layer w0.254: R15.2 U3.10 49.41,21.34 49.75,21 61.603,21 62.161,21.558 62.161,24.661 62.581,25.081 83.919,25.081 84.5,24.5 84.5,7.75 86.46,5.79 P1.2
GP1_CC_ON/O\F\F\: P1.5 R14.2 U3.11 | length 54.4
  Top Layer w0.254: R14.2 U3.11 48.14,20.86 48.5,20.5 61.984,20.5 63.234,21.75 v1(70.25,21.75) ; v1(70.25,8) 77.5,8 78.84,6.66 P1.5
  Bottom Layer w0.254: v1(70.25,8) v1(70.25,21.75)
GP2_LANE_ASSIST: P1.9 R13.2 U3.12 | length 45.5
  Top Layer w0.254: R13.2 U3.12 46.87,20.38 47.25,20 62.081,20 63.193,21.112 67.668,21.112 v1(67.75,21.03) ; v1(67.75,7.75) 67.75,6.929 68.68,5.999 P1.9
  Bottom Layer w0.254: v1(67.75,7.75) v1(67.75,21.03)
GP3_HIGH_BEAM_FWD: P1.10 R12.2 U3.13 | length 44.3
  Top Layer w0.254: R12.2 U3.13 45.6,20.293 46.299,19.594 62.344,19.594 63.181,20.431 v1(66.14,20.431) ; P1.10 v1(66.14,7.85)
  Bottom Layer w0.254: v1(66.14,7.85) v1(66.14,20.431)
GP4_HIGH_BEAM_BACK: P1.11 R11.2 U3.14 | length 42.5
  Top Layer w0.254: R11.2 U3.14 44.33,20.164 45.306,19.187 63.037,19.187 v1(63.6,19.75) ; P1.11 v1(63.6,7.85)
  Bottom Layer w0.254: v1(63.6,7.85) 63.5,7.95 63.6,8.05 v1(63.6,19.75)
GP5_HORN: P4.1 R10.2 U3.15 | length 52.5
  Top Layer w0.254: P4.1 11.372,13.005 11.75,12.627 11.75,11.378 12.423,10.705 31.772,10.705 32.25,11.182 v1(32.25,24.5) ; v1(34.966,24.5) 43.06,24.5 ; U3.15 43.06,24.5 ; R10.2 43.06,24.5
  Bottom Layer w0.254: v1(32.25,24.5) v1(34.966,24.5)
I2C_SCL: P2.3 P3.3 U1.10 U3.1 | length 70.6
  Top Layer w0.254: P3.3 17.9,6.6 18.15,6.35 38.6,6.35 38.9,6.65 P2.3 38.9,11 39.25,11.35 U3.1 39.25,17.55 v1(39.75,18.05) ; v1(41.25,18.05) U1.10
  Bottom Layer w0.254: v1(39.75,18.05) v1(41.25,18.05)
I2C_SDA: P2.4 P3.4 U1.9 U3.2 | length 78.4
  Top Layer w0.254: P3.4 19.9,9.65 20.25,10 32.5,10 33,10.5 33,18.5 33.281,18.781 40.5,18.781 ; P2.4 40.9,10.85 40.52,11.23 U3.2 40.5,13.27 40.5,18.781 ; U1.9 76.43,18.781 76.359,18.781 76.359,18.803 76.108,19.055 75.752,19.055 75.501,18.803 75.501,18.781 40.5,18.781
NetC4_1: C4.1 R9.2 | length 1.6
  Top Layer w0.254: C4.1 R9.2
NetC5_1: C5.1 R8.2 | length 2.2
  Top Layer w0.254: C5.1 81.075,14.75 R8.2
NetC6_1: C6.1 R7.2 | length 2.1
  Top Layer w0.254: C6.1 78.1,23.13 R7.2
NetC7_1: C7.1 R6.2 | length 1.5
  Top Layer w0.254: C7.1 76.43,21.87 R6.2
NetLED1_1: LED1.1 R17.2 | length 1.2
  Top Layer w0.254: LED1.1 56.342,23.141 R17.2
NetR16_2: R16.2 U3.6 | length 2
  Top Layer w0.254: R16.2@45.5,11.25 R16.2 U3.6
PEDAL_ADC_READY: P2.2 P3.2 | length 29.7
  Top Layer w0.254: P3.2 15.9,6.25 16.3,5.85 36.65,5.85 v1(37,5.5) ; P2.2 37,8.18 v1(37,10)
  Bottom Layer w0.254: v1(37,5.5) v1(37,10)
STEERING_ADC_READY: P2.5 R1.2 U1.2 | length 47.1
  Top Layer w0.254: P2.5 42.9,5.85 43.25,5.5 52,5.5 52.562,6.062 52.562,11.162 52.836,11.436 71.746,11.436 72.05,11.133 72.05,9.7 72.5,9.25 75,9.25 75.25,9.5 R1.2 75.25,12 75.68,12.43 76.43,12.43 U1.2
STEERING_IO_INTERRUPT: P2.6 U3.8 | length 8
  Top Layer w0.254: P2.6 44.9,10 45.15,10.25 47.75,10.25 48.14,10.64 U3.8
pads on no net: P1.13 P2. P3.7 P4.3 U3.7 U3.16 U3.17

## Polygon pours and split planes (outlines as drawn)
GND on Top Layer "GND_L01_P000" (solid, pour order 0): 0,0 0,30 90,30 90,0
GND on Bottom Layer "GND_L02_P002" (solid, pour order 2): 0,30 0,0 90,0 90,30

## Keep-outs
Keep-Out Layer:
  lines w0.254: 54.8,0 0,0 0,30 90,30 90,8.5 90,0 57.5,0 57.5,10.1 54.9,10.1 54.9,0

## Other copper
Top Layer:
  pour cut-out: 54.5,-0.25 54.5,10.773 57.977,10.773 58,10.75 57.977,10.727 57.977,-0.25
Bottom Layer:
  pour cut-out: 54.625,10.375 54.625,0.125 54.25,-0.25 58,-0.25 58,10.405

## Silkscreen, mask and mechanical layers (free items; w line width, h text height)
Top Overlay:
  drawing of 20 lines, arcs and shapes, not listed
  text "MSXII STEERING INTERFACE BOARD /  REV 1.1" at 4.112,25.5 h0.8
  text "POWER" at 53.75,21 h0.8
  text "HORN" at 5.148,17.85 h0.8
  text "3V3" at 14.357,9.75 h0.8 r90
  text "PEDAL RDY" at 16.408,9.75 h0.8 r90
  text "SCL" at 18.338,9.75 h0.8 r90
  text "SDA" at 20.315,9.75 h0.8 r90
  text "GND" at 22.421,9.75 h0.8 r90
  text "GND" at 24.416,9.75 h0.8 r90
  text "FROM / CONSOLE / BOARD" at 28.4,7.6 h0.8
  text "TO / PEDAL / BOARD" at -2.5,0.571 h0.8
Bottom Overlay:
  text "3V3" at 35.107,13.419 h0.8 r90
  text "PEDAL RDY" at 37.158,13.419 h0.8 r90
  text "SCL" at 39.088,13.419 h0.8 r90
  text "SDA" at 41.065,13.419 h0.8 r90
  text "STEERING RDY" at 43.321,13.419 h0.8 r90
  text "STEERING INT" at 45.321,13.419 h0.8 r90
  text "GND" at 47.321,13.419 h0.8 r90
  text "GND" at 49.317,13.419 h0.8 r90
  text "NC" at 59,13.419 h0.8 r90
  text "TURN SIG STALK" at 61.532,13.419 h0.8 r90
  text "HIGH BEAM BACK" at 64.063,13.419 h0.8 r90
  text "HIGH BEAM FWD" at 66.595,13.419 h0.8 r90
  text "LANE ASSIST" at 69.127,13.419 h0.8 r90
  text "CC CANCEL/RESUME" at 71.658,13.419 h0.8 r90
  text "GND" at 74.19,13.419 h0.8 r90
  text "GND" at 76.722,13.419 h0.8 r90
  text "CC ON/OFF" at 79.253,13.419 h0.8 r90
  text "CC SPEED" at 81.785,13.419 h0.8 r90
  text "CC DISTANCE" at 84.317,13.419 h0.8 r90
  text "CC SET" at 86.848,13.419 h0.8 r90